# Altium PCB LEDFLASHER_RC.PcbDoc
Units mil, origin at the board's own origin, x right, y up, seen from the top; angles counter-clockwise.
Board outline 1690 x 1705 mil, 2 copper layers (Top Layer, Bottom Layer); 12 components, 9 nets, 42 pads, 5 vias.
Unrouted connection lines stored in the file: 9.
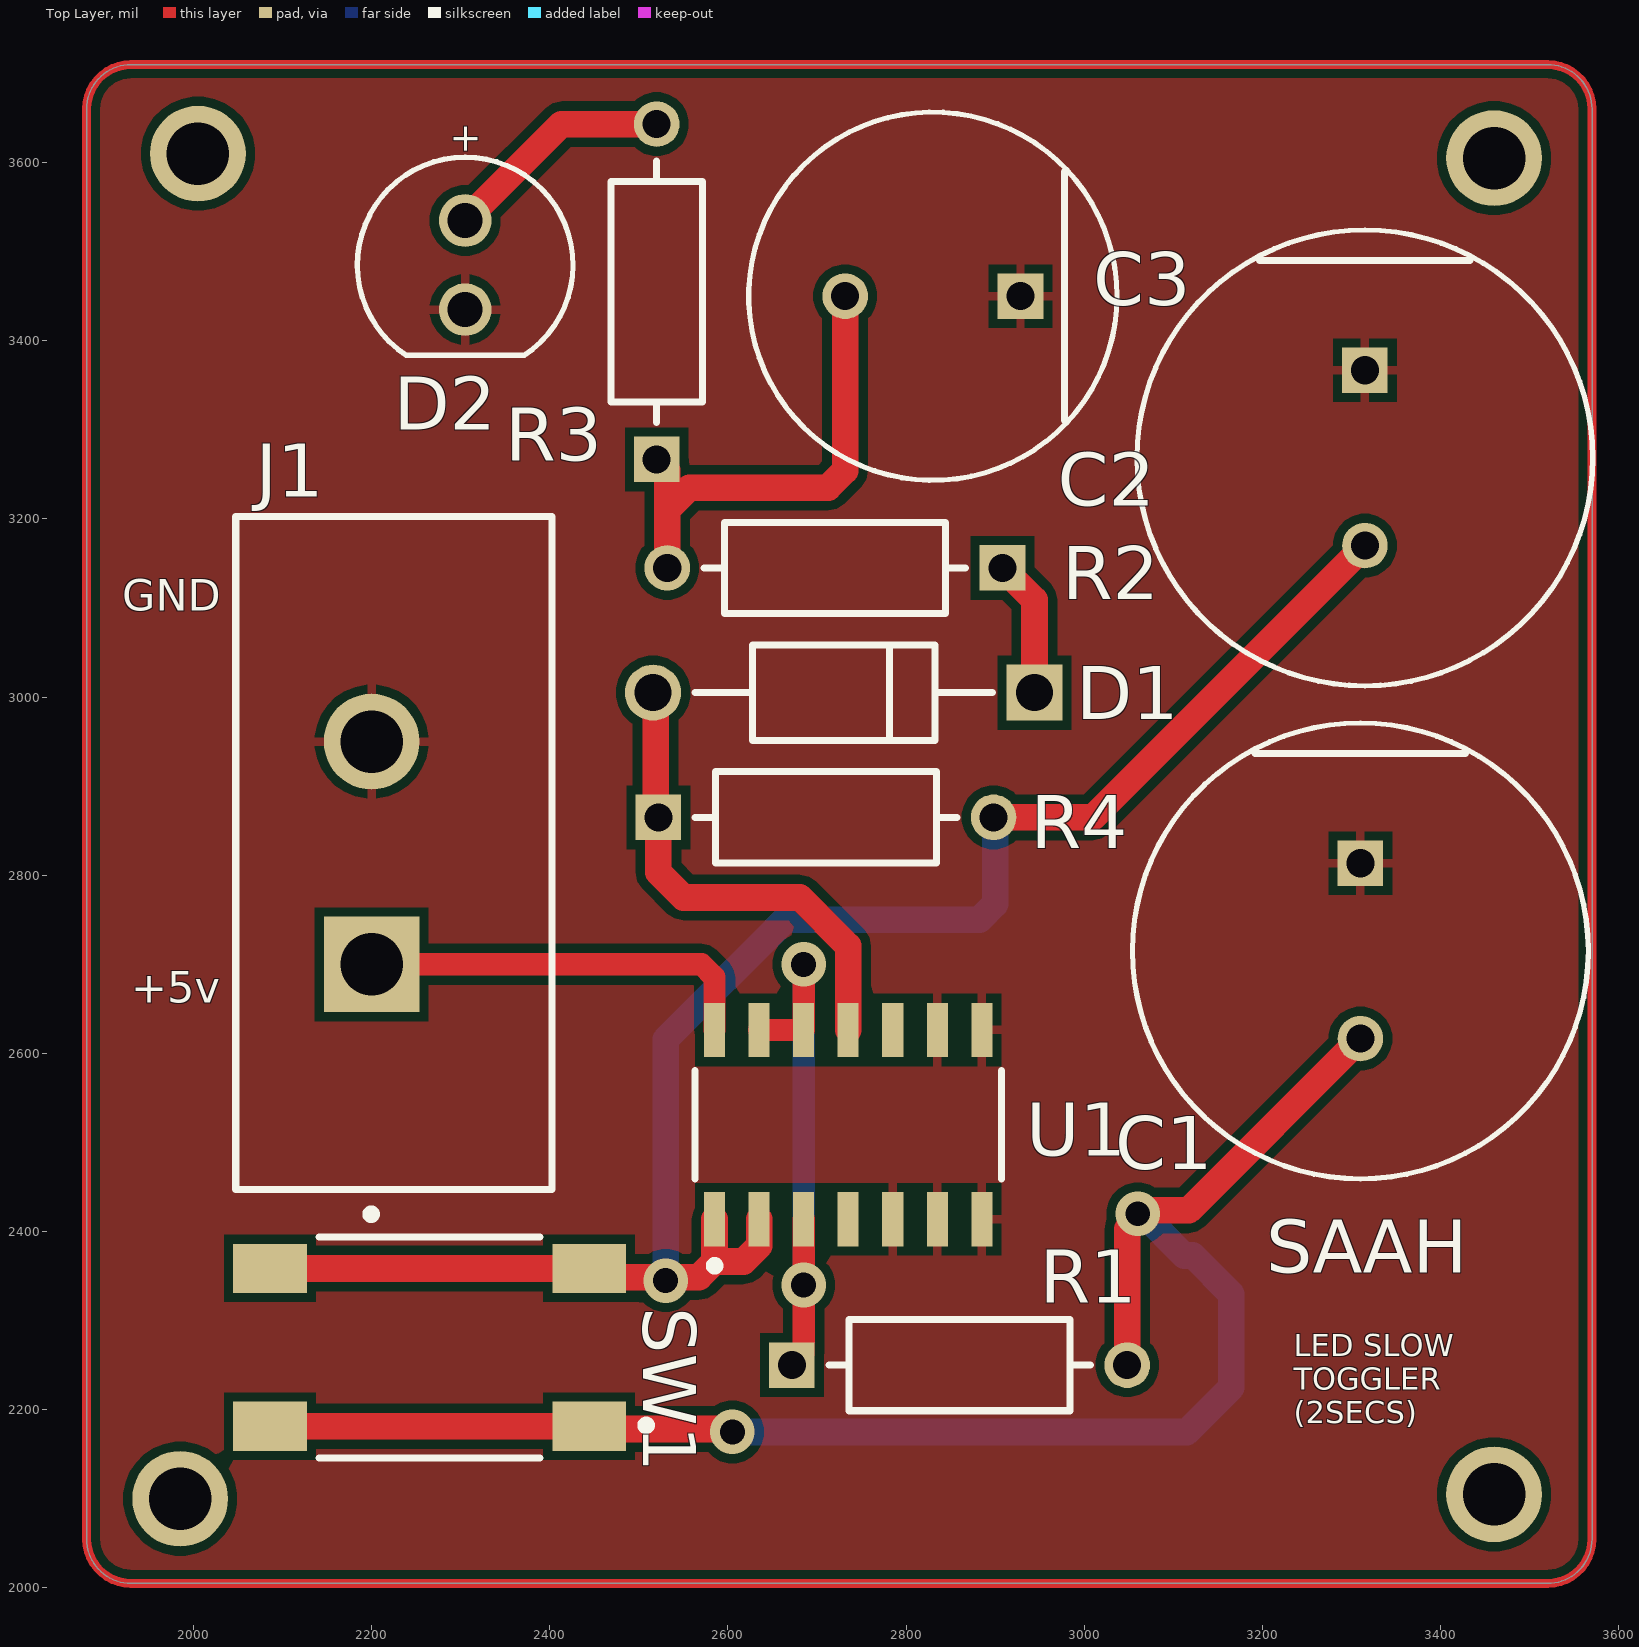
[diagram p0: Top Layer view]
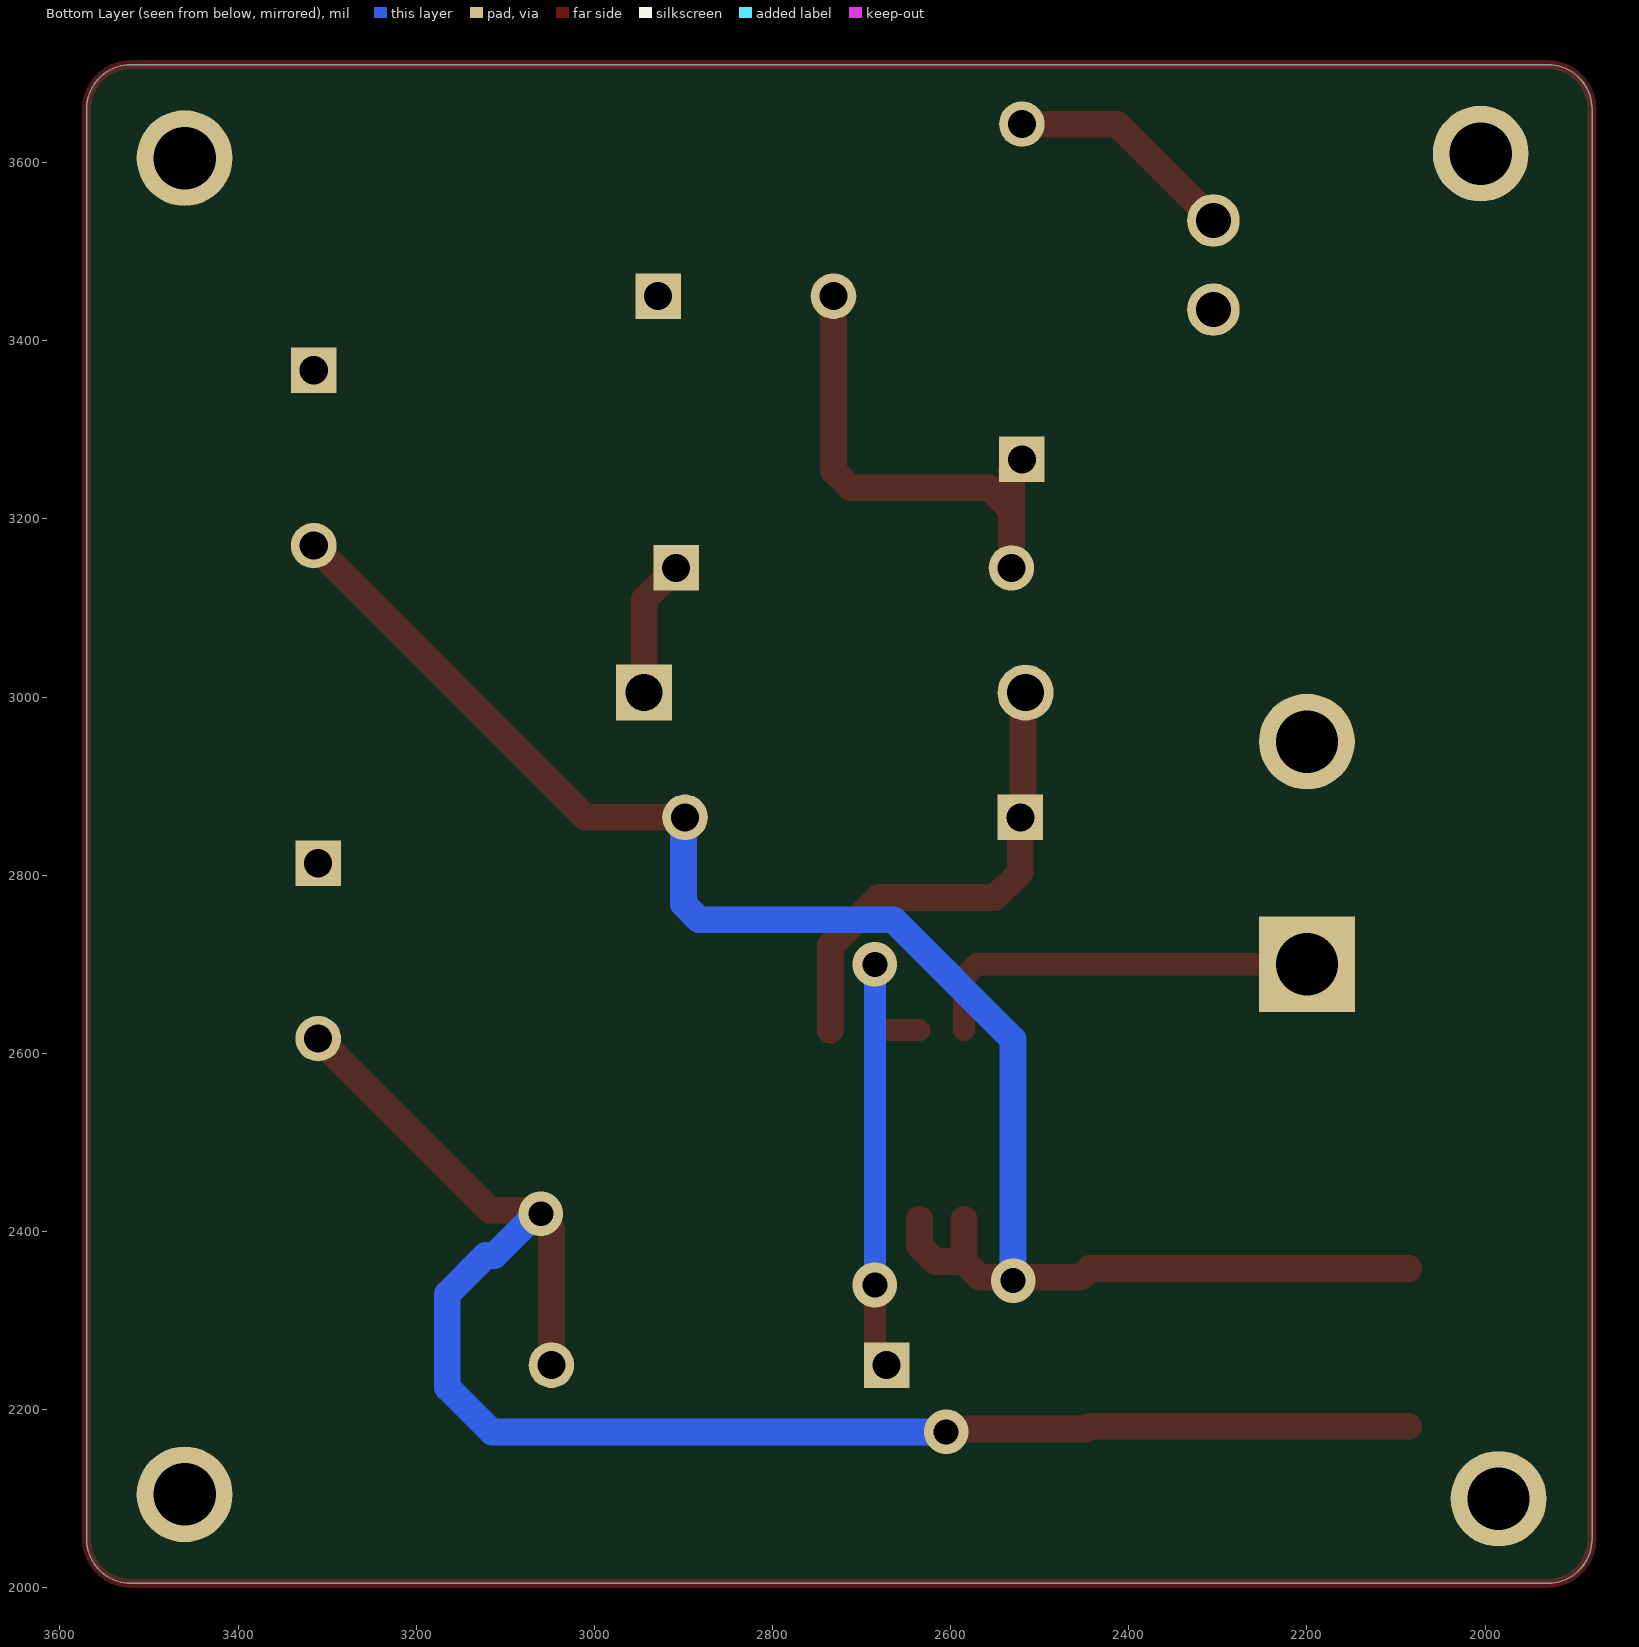
[diagram p1: Bottom Layer view, seen from below]
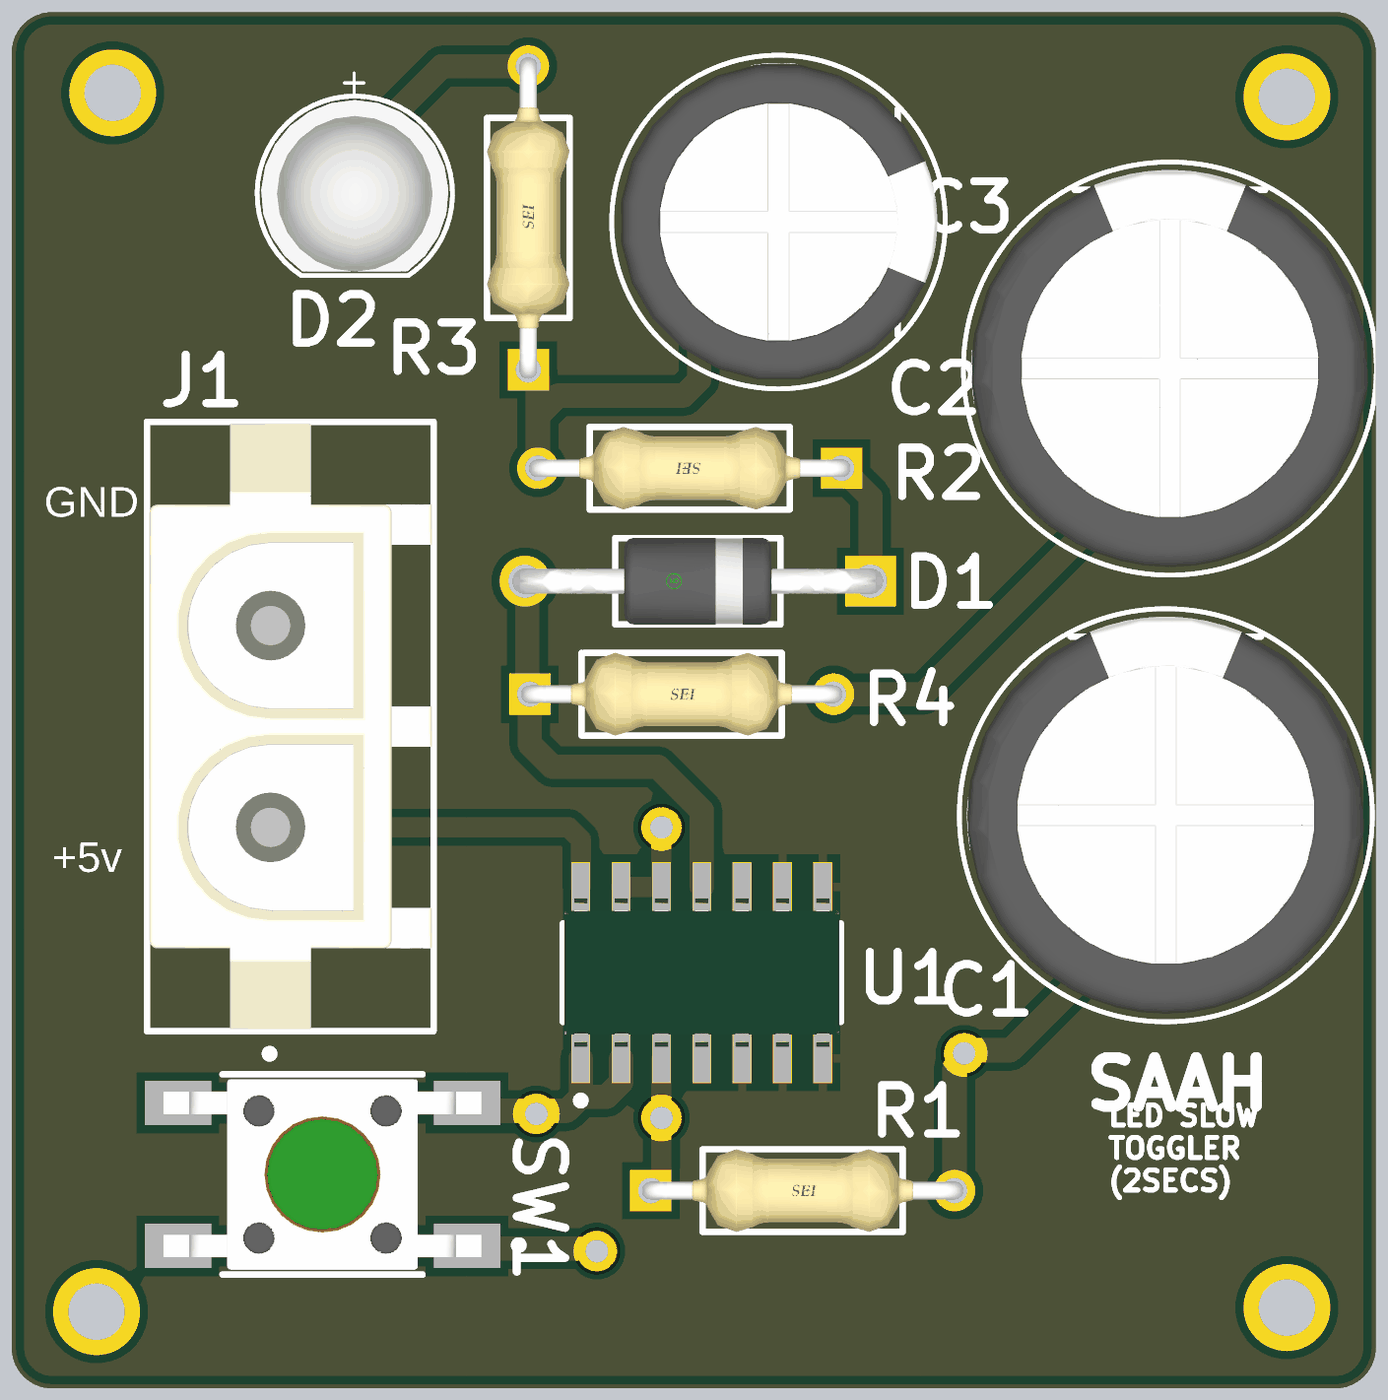
[diagram p2: 3D render of the assembled board from above, using the file's embedded part models]

## Layer stack, top to bottom
Top Solder: solder mask 0.4, Solder Resist, Dk 3.5
Top Layer: signal copper 1.4
Dielectric 1: dielectric 12.6, FR-4, Dk 4.8
Bottom Layer: signal copper 1.4
Bottom Solder: solder mask 0.4, Solder Resist, Dk 3.5

## Board outline
1880,2055 1880,3660 cw(c1930,3660) 1930,3710 3520,3710 cw(c3520,3660) 3570,3660 3570,2055 cw(c3520,2055) 3520,2005 1930,2005 cw(c1930,2055)

## Design rules (kind name [scope] priority, off if disabled: settings)
Clearance [All] p1: gap=10 ignorepadtopadclearanceinfootprint=FALSE
PolygonConnect [All] p1: connectstyle=Relief reliefconductorwidth=10 reliefentries=4 polygonreliefangle="90 Angle" airgapwidth=10
RoutingVias [All] p1: holewidth=28 width=50 viastyle="Through Hole" minholewidth=28 minwidth=50 maxholewidth=28 maxwidth=50
SolderMaskExpansion [All] p1: expansion=4 istentingtop=FALSE
SupplyNets "Schematic Supply Nets" [InNet('GND')] p1: voltage=0.000
Width [All] p1: maxlimit=50 minlimit=10 preferedwidth=30 minimp=50.000000 maximp=50.000000 favimp=50.000000
30 further rules are at their usual default settings.

## Components (designator, comment, footprint, x,y, rotation, side; value= is the part's Value field where it differs from the comment)
C1 "10u" FP-RAD-TH-D_12_5_0_5-L_20-MFG 3310,2715 r270 top
C2 "10u" FP-RAD-TH-D_10_0_5-L_20_2-MFG 2830,3450 r180 top
C3 "10n" FP-RAD-TH-D_12_5_0_5-L_20-MFG 3315,3268.43 r270 top
D1 "1N4728ATR" FP-017AH-MFG 2730,3005 r180 top
D2 "LED" WL-TMRC_D5.9H8.7 2305,3485 r270 top
J1 "350428-1" FP-350428-1-MFG 2225,2825 r90 top
R1 "100k" FP-CF14-MFG 2860,2250 r0 top
R2 "47k" FP-CF14-MFG 2720,3145 r180 top
R3 "1k" FP-CF14-MFG 2520,3455 r90 top
R4 "100k" FP-CF14-MFG 2710,2865 r0 top
SW1 "1977223-4" FP-1977223-4-MFG 2265,2270 r270 top
U1 "CD4011BM" FP-D0014A-MFG 2735,2520 r90 top

## Footprints (in the part's own frame and the unit in brackets; to place one, negate y for a bottom-side part, rotate by r counter-clockwise, add the part's x,y. Pads: shape width x height; smd on the part's side, far side on the other; paste and mask are expansions set on the pad)
FP-017AH-MFG [mm]
  rect 1.6x1.6 hole 1.05 paste-2539.97 mask+0: 1(-5.438,0)
  round 1.6 hole 1.05 paste-2539.97 mask+0: 2(5.438,0)
  silkscreen extent -4.24,-1.36 4.24,1.36, body extent -6.34,-1.46 6.34,1.46, height 0.25
FP-350428-1-MFG [mm]
  rect 2.73x2.73 hole 1.78 paste-2539.97 mask+0: 1(-3.175,0.635)
  round 2.73 hole 1.78 paste-2539.97 mask+0: 2(3.175,0.635)
  silkscreen extent -10.42,-4.51 9.59,4.51, body extent -9.69,-4.61 9.69,4.61, height 0.25
FP-1977223-4-MFG [mm]
  rect 1.4x2.1 smd paste+0 mask+0: 1(2.25,4.55) 2(2.25,-4.55) 3(-2.25,4.55) 4(-2.25,-4.55)
  silkscreen extent -3.15,-3.15 3.15,6.3, body extent -3.25,-5.7 3.25,5.7, height 0.25
FP-CF14-MFG [mm]
  rect 1.3x1.3 hole 0.8 paste-2539.97 mask+0: 1(-4.78,0)
  round 1.3 hole 0.8 paste-2539.97 mask+0: 2(4.78,0)
  silkscreen extent -3.73,-1.3 3.73,1.3, body extent -5.53,-1.4 5.53,1.4, height 0.25
FP-D0014A-MFG [mm]
  rect 1.55x0.6 smd paste-1000 mask+0: 1(-2.7,3.81) 2(-2.7,2.54) 3(-2.7,1.27) 4(-2.7,0) 5(-2.7,-1.27) 6(-2.7,-2.54) 7(-2.7,-3.81) 8(2.7,-3.81) 9(2.7,-2.54) 10(2.7,-1.27) 11(2.7,0) 12(2.7,1.27) 13(2.7,2.54) 14(2.7,3.81)
  silkscreen extent -4.15,-4.38 1.55,4.38, body extent -3.57,-4.62 3.57,4.62, height 0.25
FP-RAD-TH-D_10_0_5-L_20_2-MFG [mm]
  rect 1.3x1.3 hole 0.8 paste-2539.97 mask+0: 1(-2.5,0)
  round 1.3 hole 0.8 paste-2539.97 mask+0: 2(2.5,0)
  silkscreen extent -5.25,-5.25 5.25,5.25, body extent -5.35,-5.35 5.35,5.35, height 0.25
FP-RAD-TH-D_12_5_0_5-L_20-MFG [mm]
  rect 1.3x1.3 hole 0.8 paste-2539.97 mask+0: 1(-2.5,0)
  round 1.3 hole 0.8 paste-2539.97 mask+0: 2(2.5,0)
  silkscreen extent -6.5,-6.5 6.5,6.5, body extent -6.6,-6.6 6.6,6.6, height 0.25
WL-TMRC_D5.9H8.7 [mm] "THT Mono-color Round Color LED, 2-leads"
  round 1.5 hole 1: 1(-1.27,0) 2(1.27,0)
  silkscreen extent -3.07,-3.07 2.58,3.08, body extent -2.95,-2.95 2.45,2.95, height 9.2

## Part data
C1 C3: library part CMP-05427-000380-1, "Aluminum Electrolytic Capacitors (Radial Lead Type) 10uF ±20% 450V", Capacitance=10uF, Case/Package=Radial, Leakage Current=280uA, Max Operating Temperature=105°C, Min Operating Temperature=-25°C, Package Quantity=200, Ripple Current=490mA, Tolerance=20%, Voltage=450V, Construction=RADIAL, Diameter=12.5mm, Dissipation Factor=0.24%, Height=20mm, Height - Seated (Max)=0.787inch, Lead Diameter=0.6mm, Lead Free="Lead Free", Lead Pitch=5mm, Length=20mm, Life (Hours)=10000Hour, Mount="Through Hole", Packaging=Bulk, Radiation Hardening=No, REACH SVHC="No SVHC", RoHS Compliant=Yes, Series=EE, Termination=Radial, Voltage Rating=450V, Voltage Rating (DC)=450V
C2: library part CMP-05427-000214-1, "Aluminum Electrolytic Capacitors (Radial Lead Type) 10uF ±20% 400V", Capacitance=10uF, Case/Package=Radial, Dielectric Material=Aluminium, Max Operating Temperature=105°C, Min Operating Temperature=-25°C, Package Quantity=200, Ripple Current=80mA, Tolerance=20%, Voltage=400V, Construction=RADIAL, Contact Plating=Tin, Diameter=10mm, Dissipation Factor=0.24%, Height=20mm, Height - Seated (Max)=0.866inch, Lead Diameter=0.6mm, Lead Free="Lead Free", Lead Pitch=5mm, Lead/Base Style=Straight, Length=20mm, Life (Hours)=2000Hour, Mount="Through Hole", Number of Pins=2, Packaging=Bulk, Polarity=Polar, Radiation Hardening=No, REACH SVHC="No SVHC", Ripple Current (AC)=80mA, RoHS Compliant=Yes, Series=NHG, Termination=Radial, Voltage Rating=400V, Voltage Rating (DC)=400V
D1: library part CMP-00278-84408757-1, "1N4728ATR 1N4728 Series 1 W 3.3 V 100 uA Through Hole Zener Diode - DO-41", Forward Voltage=1.2V, Manufacturer Lifecycle Status=ACTIVE, Max Operating Temperature=200°C, Max Power Dissipation=1W, Max Reverse Leakage Current=100µA, Min Operating Temperature=-65°C, Output Current=330mA, Test Current=76mA, Tolerance=5%, Voltage Rating (DC)=3.3V, Contact Plating=Tin, Diameter=2.72mm, Element Configuration=Single, ESD Protection=No, Impedance=10Ω, Lead Free="Lead Free", Length=5.2mm, Lifecycle Status=Production, Material=Glass, Mount="Through Hole", NexarPartId=84408757, Number of Pins=2, Packaging="Cut Tape", Peak Reverse Current=100µA, Power Dissipation=1W, Power Rating=1W, Radiation Hardening=No, REACH SVHC="No SVHC", RoHS=Compliant, Schedule B="8541100050, 8541100050", Voltage Tolerance=5%, Weight=245mg, Working Voltage=3.3V, Zener Current=76mA, Zener Voltage=3.3V
D2: library part CMP-03913-71241449-1, "151051SS04000 WL-TMRC THT Mono-color Round Color", Forward Current=100mA, Forward Voltage=2.1V, Max Operating Temperature=85°C, Max Reverse Voltage (DC)=5V, Min Operating Temperature=-40°C, Dominant Wavelength=635nm, Height=8.6mm, Length=5mm, Luminous Intensity=250mcd, Mount="Through Hole", NexarPartId=71241449, Packaging=Bulk, Peak Wavelength=640nm, RoHS=Compliant, Viewing Angle=40°, Wavelength=635nm, Width=5mm
J1: library part CMP-03369-000080-1, "CONN HEADER VERT 2POS 6.35MM", Current Rating=12A, Manufacturer="TE Connectivity", Temperature="-40°C to +105°C", Temperature Range High=+105°C, Temperature Range Low=-40°C, Voltage Rating=600V, Automotive=No, Category=Conn, ComponentLink2Description=Datasheet, ComponentLink2URL=https://www.te.com/commerce/DocumentDelivery/DDEController?Action=showdoc&DocId=Customer+Drawing%7F350428%7FY2%7Fpdf%7FEnglish%7FENG_CD_350428_Y2.pdf%7F350428-1, Conn Gender=Male, Conn Orientation=Vertical, Contact Material=Gold,Nickel, Device Class L1=Connectors, Device Class L2="Headers and Wire Housings", Device Class L3=unset, Digikey Description="CONN HEADER VERT 2POS 6.35MM", Height=14.99mm, Lead Free=Yes, Manufacturer Part Number=350428-1, Mouser Description="Connector, Soft Shell; Universal MATE-N-LOK; 2; Nylon; Natural; 19 A; 600 VAC", Number Of Contacts=2, Number Of Rows=1, Octopart=https://octopart.com/350428-1-te+connectivity-46505355, Package=350428-1, Pitch=6.35mm, RoHS=TRUE, Standoff Height=0.63mm
R1 R2 R3 R4: library part CMP-26528-000003-1, "RES 7.5K OHM 1/4W 5% AXIAL", Case/Package=Axial, Max Operating Temperature=155°C, Max Power Dissipation=250mW, Min Operating Temperature=-55°C, Resistance=7.5kR, Resistor Type="Carbon Film", Temperature Coefficient=-400ppm/°C, Tolerance=5%, Contact Plating=Tin, Diameter=2.3mm, Features="Flame Retardant Coating", Lead Free="Lead Free", Length=0.256inch, Mount="Through Hole", Number of Terminations=2, Packaging="Tape and Reel", Power Rating=250mW, Radiation Hardening=No, RoHS Compliant=Yes, Series=CF
SW1: library part CMP-03407-000020-1, "SWITCH TACTILE SPST-NO 0.05A 12V", RoHS Compliant=Yes
U1: library part CMP-1627-00066-3, "IC GATE NAND 4CH 2-INP 14SOIC", Ambient Temperature Range High=+125°C, Ambient Temperature Range Low=-55°C, Manufacturer="Texas Instruments", Max Supply Voltage=18V, Min Supply Voltage=3V, Package=D0014A, Quiescent Current=0.01-0.02uA, Temperature="-55°C to +125°C", Automotive=No, Category=IC, ComponentLink2Description=Datasheet, ComponentLink2URL=http://www.ti.com/lit/ds/symlink/cd4011b.pdf, Device Class L1="Integrated Circuits (ICs)", Device Class L2="Logic ICs", Device Class L3="Logic Gates", Digikey Description="IC GATE NAND 4CH 2-INP 14SOIC", Height=1.75mm, Lead Free=Yes, Logic Function Desc=NAND, Manufacturer Part Number=CD4011BM, Mouser Description="CMOS Quad 2-Input NAND Gate 14-SOIC -55 to 125", Number Of Circuits=4, Number Of Inputs=2, Number Of Outputs=1, Octopart=https://octopart.com/cd4011bm-texas+instruments-16544, Propagation Delay=45ns, RoHS=TRUE, Standoff Height=0.1mm, Temperature Range High=+125°C, Temperature Range Low=-55°C

## Free pads (board coordinates)
  round 107.48 hole 70.08 paste-99999 mask+0: 3(1985,2100) 3(2005,3610) 3(3460,2105) 3(3460,3605)

## Via types
v1: diameter 50, hole 28, Top Layer to Bottom Layer, 5 vias

## Nets (pads, with @x,y where several pads share a name; then routed paths per layer and width w, separated by ;. In a path a pad name is that pad's centre, name@x,y a point inside that pad or via, vN(x,y) a via of type N, cw(c..) or ccw(c..) an arc to the next point about the centre after c; other vN are vias at no path point)
GND: C1.1 C2.1 C3.1 D2.2 J1.2 U1.5 U1.6 U1.7 U1.8 U1.9
NetC1_2: C1.2 R1.2 SW1.1 SW1.2 | length 1856.1
  Top Layer w30: SW1.2 SW1.1 2447.34,2178.21 2601.79,2178.21 v1(2605,2175) ; R1.2 3048.19,2402.78 3060,2414.59 v1(3060,2420) 3063.83,2423.83 3117.25,2423.83 C1.2
  Bottom Layer w30: v1(2605,2175) 3115,2175 3165,2225 3165,2330 3121.91,2373.09 3112.08,2373.09 3065.17,2420 v1(3060,2420)
NetC2_2: C2.2 R2.2 R3.1 | length 540.6
  Top Layer w30: R3.1 2531.81,3255 2531.81,3210 ; R2.2 2531.81,3210 ; C2.2 2731.57,3254.15 2712.43,3235 2556.81,3235 2531.81,3210
NetC3_2: C3.2 R4.2 SW1.3 SW1.4 U1.1 U1.2 | length 1992.9
  Top Layer w30: SW1.4 SW1.3 2453.89,2348.83 2526.17,2348.83 v1(2530,2345) 2533.83,2348.83 2567.43,2348.83 2585,2366.4 ; U1.1 2585,2366.4 ; U1.2 2635,2383.97 2617.43,2366.4 2585,2366.4 ; R4.2 3010,2865 C3.2
  Bottom Layer w30: v1(2530,2345) 2530,2615.71 2664.29,2750 2882.43,2750 2900,2767.57 2900,2863.19 R4.2
NetD1_1: D1.1 R2.1 | length 154.9
  Top Layer w30: R2.1 2944.09,3109.09 D1.1
NetD1_2: D1.2 R4.1 U1.11 | length 546
  Top Layer w30: D1.2 2518.86,3002.05 2518.86,2867.95 R4.1 2521.81,2803.19 2550,2775 2680.71,2775 2735,2720.71 U1.11
NetD2_1: D2.1 R3.2 | length 259.8
  Top Layer w30: D2.1 2413.2,3643.19 R3.2
NetJ1_1: J1.1 U1.14 | length 450.1
  Top Layer w25: J1.1 2570.36,2700 2585,2685.36 U1.14
NetR1_1: R1.1 U1.3 U1.12 U1.13 | length 652.9
  Top Layer w25: U1.13 U1.12 v1(2685,2700) ; R1.1 2684.9,2263.09 2684.9,2277.64 2685,2277.74 v1(2685,2340) U1.3
  Bottom Layer w25: v1(2685,2340) v1(2685,2700)
pads on no net: U1.4 U1.10
copper on no net: | length 6704.2
  Top Layer w10: 1880,2055 ccw(c1930,2055) 1930,2005 3520,2005 ccw(c3520,2055) 3570,2055 3570,3660 ccw(c3520,3660) 3520,3710 2445,3710 1930,3710 ccw(c1930,3660) 1880,3660 1880,2055

## Polygon pours and split planes (outlines as drawn)
GND on Top Layer "GND_L01_P000" (solid, pour order 0): 1880,2055 1880,3660 cw(c1930,3660) 1930,3710 3520,3710 cw(c3520,3660) 3570,3660 3570,2055 cw(c3520,2055) 3520,2005 1930,2005 cw(c1930,2055)

## Silkscreen, mask and mechanical layers (free items; w line width, h text height)
Top Overlay:
  text "GND" at 1920,3085 h60
  text "+5v" at 1930,2645 h60
  text "SAAH" at 3204,2354 h60
  text "LED SLOW  / TOGGLER  / (2SECS)" at 3235,2185 h25

## Text inside footprints (layer, text, board x,y; h text height)
D2: Top Overlay "+" at 2292.01,3644.45 h31.5 r270